# EAGLE board version_0_test_pinheader (EAGLE 8.3.1)
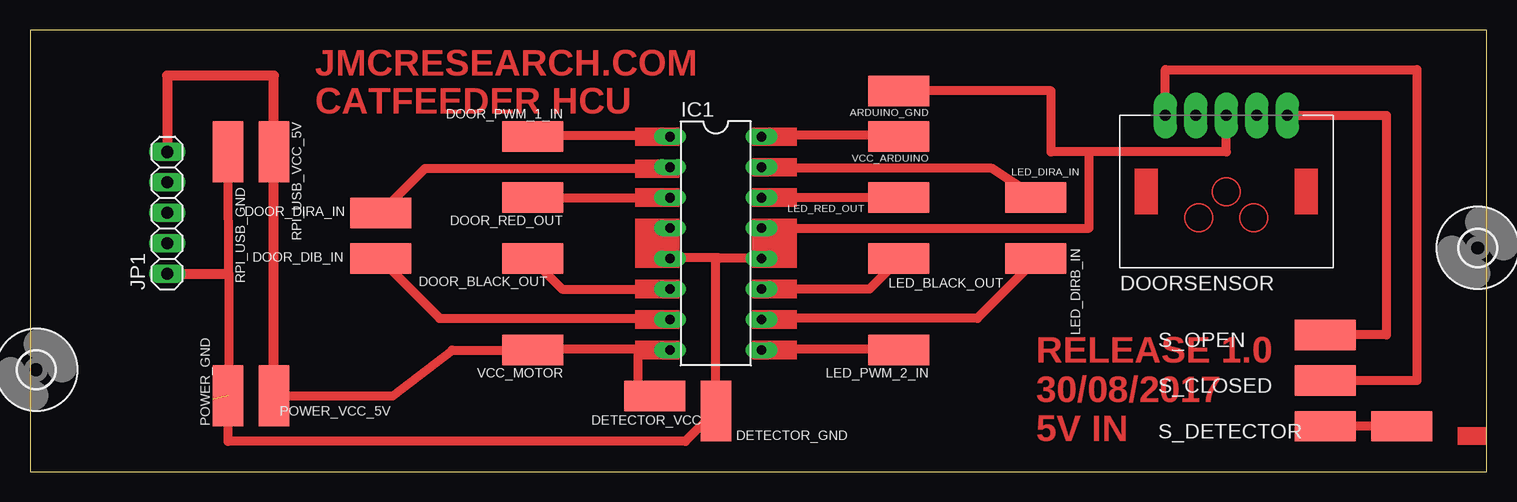
[diagram p0: board, top side]

Size 121.41 x 36.83 mm. Coordinates in mm from the lower left corner, seen from the top.
Outline: 0,0 121.41,0 121.41,36.83 0,36.83 0,0
Copper layers (1*16): Top 0.035mm / dielectric 1.5mm / Bottom 0.035mm
Design rules "default": minimum track width 6mil, minimum drill 0.35mm, track to track 6mil, track to pad 6mil, pad to pad 6mil, via to via 6mil, smd to smd 6mil, copper to edge 40mil, drill to drill 6mil, minimum pad ring 10mil, minimum via ring 8mil, stop-mask expansion 4mil, vias tented up to drill 0mil, thermal gap 10mil

## Footprints (pad centres in the part's own frame; a part is rotated, then mirrored left to right if it is on the bottom)
SMD2,54-5,08 = smd 2.54 x 5.08: 1 0,0
DOORSENSOR = drill 0.9 pad 1.93 long: GND 0,6.35; L1 -5.08,6.35; L2 -2.54,6.35; R1 5.08,6.35; R2 2.54,6.35
DIL16 = drill 0.813 long: 1 -8.89,-3.81; 2 -6.35,-3.81; 3 -3.81,-3.81; 4 -1.27,-3.81; 5 1.27,-3.81; 6 3.81,-3.81; 7 6.35,-3.81; 8 8.89,-3.81; 9 8.89,3.81; 10 6.35,3.81; 11 3.81,3.81; 12 1.27,3.81; 13 -1.27,3.81; 14 -3.81,3.81; 15 -6.35,3.81; 16 -8.89,3.81
1X05 = drill 1.016 long: 1 -5.08,0; 2 -2.54,0; 3 0,0; 4 2.54,0; 5 5.08,0
3,0 = hole 3: 0,0

## Placement (x,y rotation side)
ARDUINO_GND  [SMD2,54-5,08]  72.39,31.75 90 top
DETECTOR_GND  [SMD2,54-5,08]  57.15,5.08 180 top
DETECTOR_VCC  [SMD2,54-5,08]  52.07,6.35 270 top
DOOR_BLACK_OUT  [SMD2,54-5,08]  41.91,17.78 90 top
DOOR_DIB_IN  [SMD2,54-5,08]  29.21,17.78 90 top
DOOR_DIRA_IN  [SMD2,54-5,08]  29.21,21.59 90 top
DOOR_PWM_1_IN  [SMD2,54-5,08]  41.91,27.94 90 top
DOOR_RED_OUT  [SMD2,54-5,08]  41.91,22.86 90 top
DOORSENSOR  DOORSENSOR  [DOORSENSOR]  99.69,23.37 0 top
IC1  L293E  [DIL16]  57.15,19.05 270 top
JP1  [1X05]  11.43,21.59 90 top
LED_BLACK_OUT  [SMD2,54-5,08]  72.39,17.78 90 top
LED_DIRA_IN  [SMD2,54-5,08]  83.82,22.86 90 top
LED_DIRB_IN  [SMD2,54-5,08]  83.82,17.78 90 top
LED_PWM_2_IN  [SMD2,54-5,08]  72.39,10.16 90 top
LED_RED_OUT  [SMD2,54-5,08]  72.39,22.86 90 top
POWER_GND  [SMD2,54-5,08]  16.51,6.35 0 top
POWER_VCC_5V  [SMD2,54-5,08]  20.32,6.35 0 top
RPI_USB_GND  [SMD2,54-5,08]  16.51,26.67 180 top
RPI_USB_VCC_5V  [SMD2,54-5,08]  20.32,26.67 180 top
S_CLOSED  [SMD2,54-5,08]  107.95,7.62 270 top
S_DETECTOR  [SMD2,54-5,08]  107.95,3.81 270 top
S_DETECTOR_ARDUINO  [SMD2,54-5,08]  114.3,3.81 90 top
S_OPEN  [SMD2,54-5,08]  107.95,11.43 270 top
U$1  [3,0]  120.65,18.67 0 top
U$2  [3,0]  0.51,8.51 0 top
VCC_ARDUINO  [SMD2,54-5,08]  72.39,27.94 90 top
VCC_MOTOR  [SMD2,54-5,08]  41.91,10.16 90 top

## Library data of the parts
ARDUINO_GND DETECTOR_GND DETECTOR_VCC DOOR_BLACK_OUT DOOR_DIB_IN DOOR_DIRA_IN DOOR_PWM_1_IN DOOR_RED_OUT LED_BLACK_OUT LED_DIRA_IN LED_DIRB_IN LED_PWM_2_IN LED_RED_OUT POWER_GND POWER_VCC_5V RPI_USB_GND RPI_USB_VCC_5V S_CLOSED S_DETECTOR S_DETECTOR_ARDUINO S_OPEN VCC_ARDUINO VCC_MOTOR = wirepad
DOORSENSOR = custom_components
IC1 = texas; MF: Arrow Electronics; MPN: L293E; OC_FARNELL: 1467711; OC_NEWARK: 89K0732
JP1 = pinhead
U$1 U$2 = holes

## Nets
GND: ARDUINO_GND.1 DETECTOR_GND.1 DOORSENSOR.GND IC1.4 IC1.5 IC1.12 IC1.13 JP1.1 POWER_GND.1 RPI_USB_GND.1
N$2: S_DETECTOR.1 S_DETECTOR_ARDUINO.1
N$3: DOORSENSOR.L1 S_CLOSED.1
N$4: DOORSENSOR.R1 S_OPEN.1
N$5: DOOR_BLACK_OUT.1 IC1.6
N$6: DOOR_RED_OUT.1 IC1.3
N$7: IC1.9 LED_PWM_2_IN.1
N$8: DOOR_PWM_1_IN.1 IC1.1
N$9: DOOR_DIRA_IN.1 IC1.2
N$10: DOOR_DIB_IN.1 IC1.7
N$11: IC1.10 LED_DIRB_IN.1
N$12: IC1.15 LED_DIRA_IN.1
N$13: IC1.11 LED_BLACK_OUT.1
N$14: IC1.14 LED_RED_OUT.1
VCC_ARDUINO: IC1.16 VCC_ARDUINO.1
VCC_MOTOR: DETECTOR_VCC.1 IC1.8 JP1.5 POWER_VCC_5V.1 RPI_USB_VCC_5V.1 VCC_MOTOR.1

## Tracks (layer width: path | path; a pad name or v marks a point on that pad's centre or on a via)
GND  (1 unrouted)
  Top 0.406: 16.46,16.51 16.54,16.59
  Top 0.762: IC1.4 53.34,17.83 | 60.96,17.83 IC1.13 88.27,20.32 88.27,26.67 | 57.44,17.83 60.96,17.83 | 57.44,17.83 53.34,17.83 | 53.34,17.83 IC1.5 | 60.96,17.83 IC1.12 | 88.27,26.67 99.69,26.67 DOORSENSOR.GND | 88.27,26.67 85.09,26.67 85.09,31.75 ARDUINO_GND.1 | 57.44,17.83 57.15,17.54 DETECTOR_GND.1 54.61,2.54 16.51,2.54 POWER_GND.1 16.56,11.56 16.54,16.59 16.51,25.37 RPI_USB_GND.1
  Top 0.813: JP1.1 16.46,16.51
N$2
  Top 0.762: S_DETECTOR_ARDUINO.1 S_DETECTOR.1
N$3
  Top 0.762: DOORSENSOR.L1 94.67,29.72 94.61,29.64 DOORSENSOR.L1 | DOORSENSOR.L1 94.61,33.53 115.57,33.53 115.57,7.62 S_CLOSED.1
N$4
  Top 0.762: 104.34,29.72 DOORSENSOR.R1 113.03,29.72 113.03,11.43 S_OPEN.1
N$5
  Top 0.762: IC1.6 44.35,15.24 41.91,17.68 DOOR_BLACK_OUT.1
N$6
  Top 0.102: 41.91,22.91 DOOR_RED_OUT.1
  Top 0.762: IC1.3 43.13,22.86 41.91,22.91
N$7
  Top 0.762: IC1.9 60.96,10.21 72.39,10.21 LED_PWM_2_IN.1
N$8
  Top 0.762: IC1.1 53.34,28.04 41.91,28.04 DOOR_PWM_1_IN.1
N$9
  Top 0.762: DOOR_DIRA_IN.1 32.92,25.3 53.34,25.3 IC1.2
N$10
  Top 0.762: IC1.7 53.34,12.8 34.14,12.8 29.26,17.68 DOOR_DIB_IN.1
N$11
  Top 0.762: IC1.10 60.96,12.8 78.94,12.8 83.82,17.68 LED_DIRB_IN.1
N$12
  Top 0.762: IC1.15 60.96,25.3 80.16,25.3 83.82,22.91 LED_DIRA_IN.1
N$13
  Top 0.762: IC1.11 69.95,15.24 72.39,17.68 LED_BLACK_OUT.1
N$14
  Top 0.762: IC1.14 71.17,22.86 72.39,22.91 LED_RED_OUT.1
VCC_ARDUINO
  Top 0.762: IC1.16 60.96,28.04 72.39,28.04 VCC_ARDUINO.1
VCC_MOTOR
  Top 0.762: 50.69,10.21 41.91,10.21 VCC_MOTOR.1 35.18,10.16 30.23,6.35 POWER_VCC_5V.1 | 50.69,10.21 53.34,10.21 IC1.8 | DETECTOR_VCC.1 50.69,6.46 50.69,10.21
  Top 0.813: POWER_VCC_5V.1 RPI_USB_VCC_5V.1 20.32,33.02 11.43,33.02 JP1.5
(copper drawn outside any net)
  shapes: Top area x20

## Text on the board
Top: JMCRESEARCH.COM / CATFEEDER HCU | RELEASE 1.0 / 30/08/2017 / 5V IN